# Altium PCB Beep-it.PcbDoc
Units mil, origin at the board's own origin, x right, y up, seen from the top; angles counter-clockwise.
Board outline 6000 x 4000 mil, 2 copper layers (Top Layer, Bottom Layer); 23 components, 21 nets, 78 pads, 0 vias.
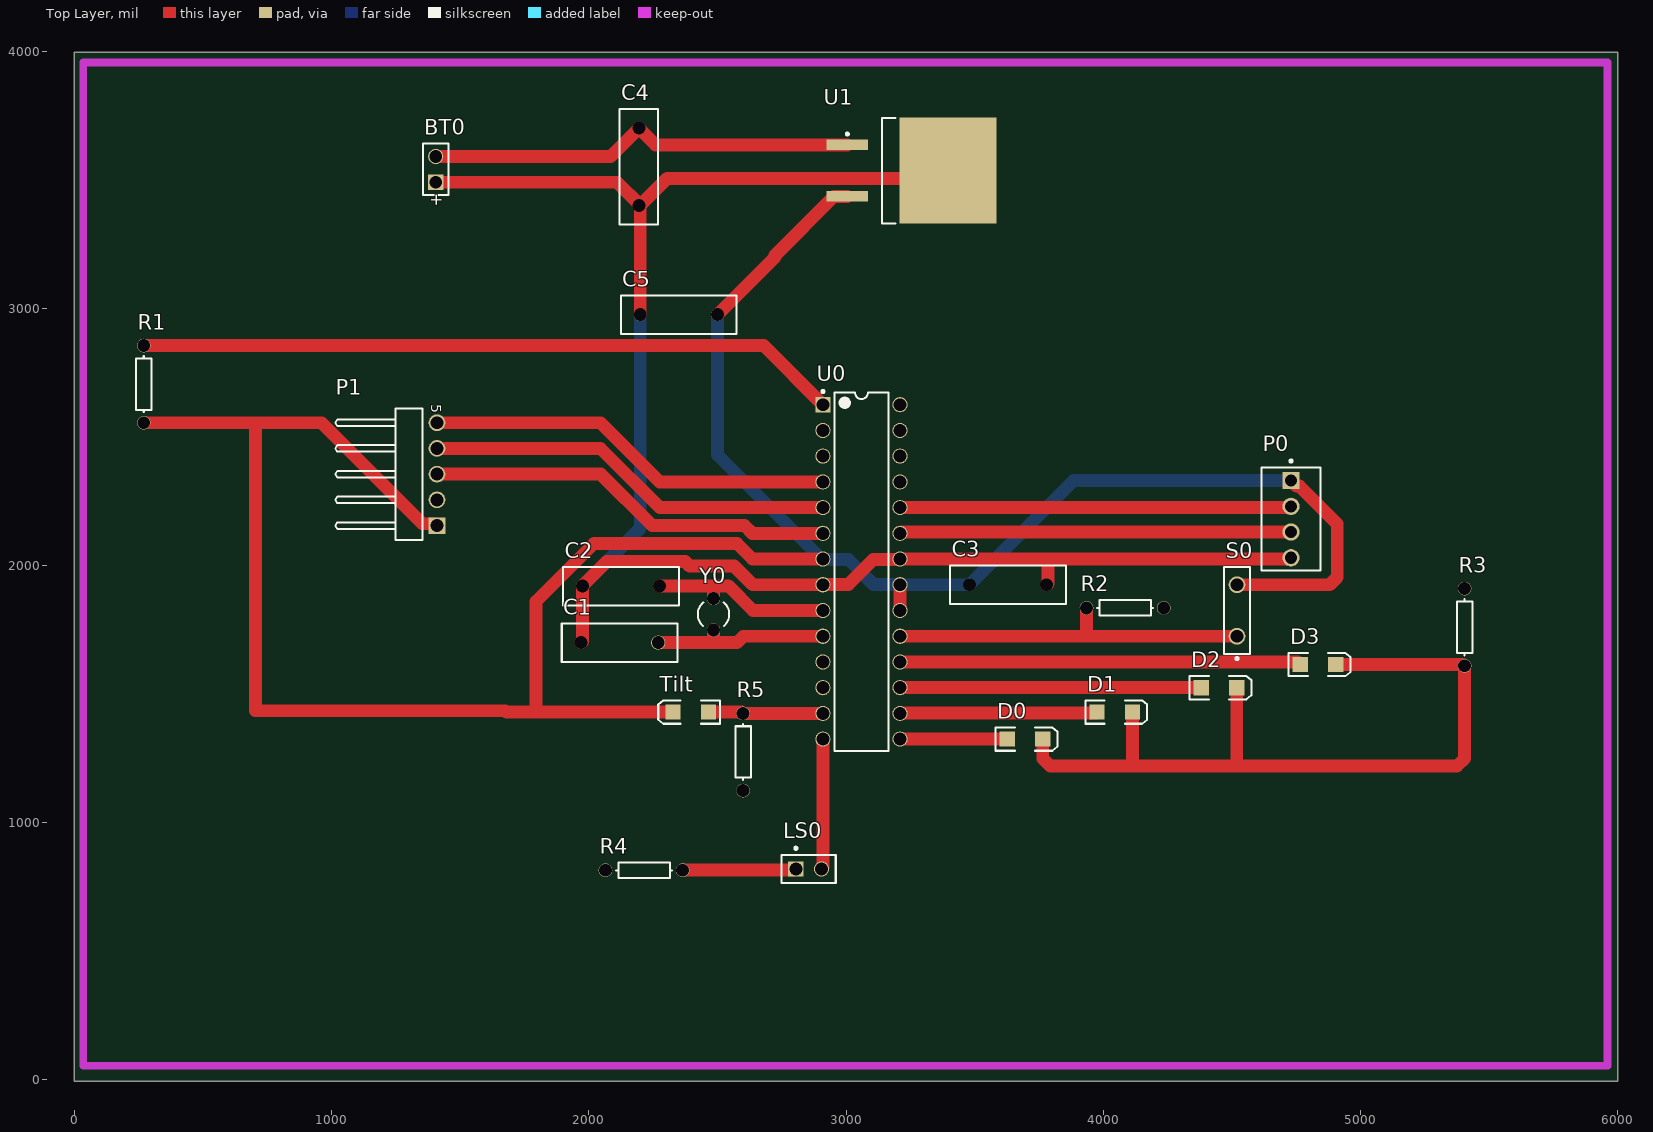
[diagram p0: Top Layer view]
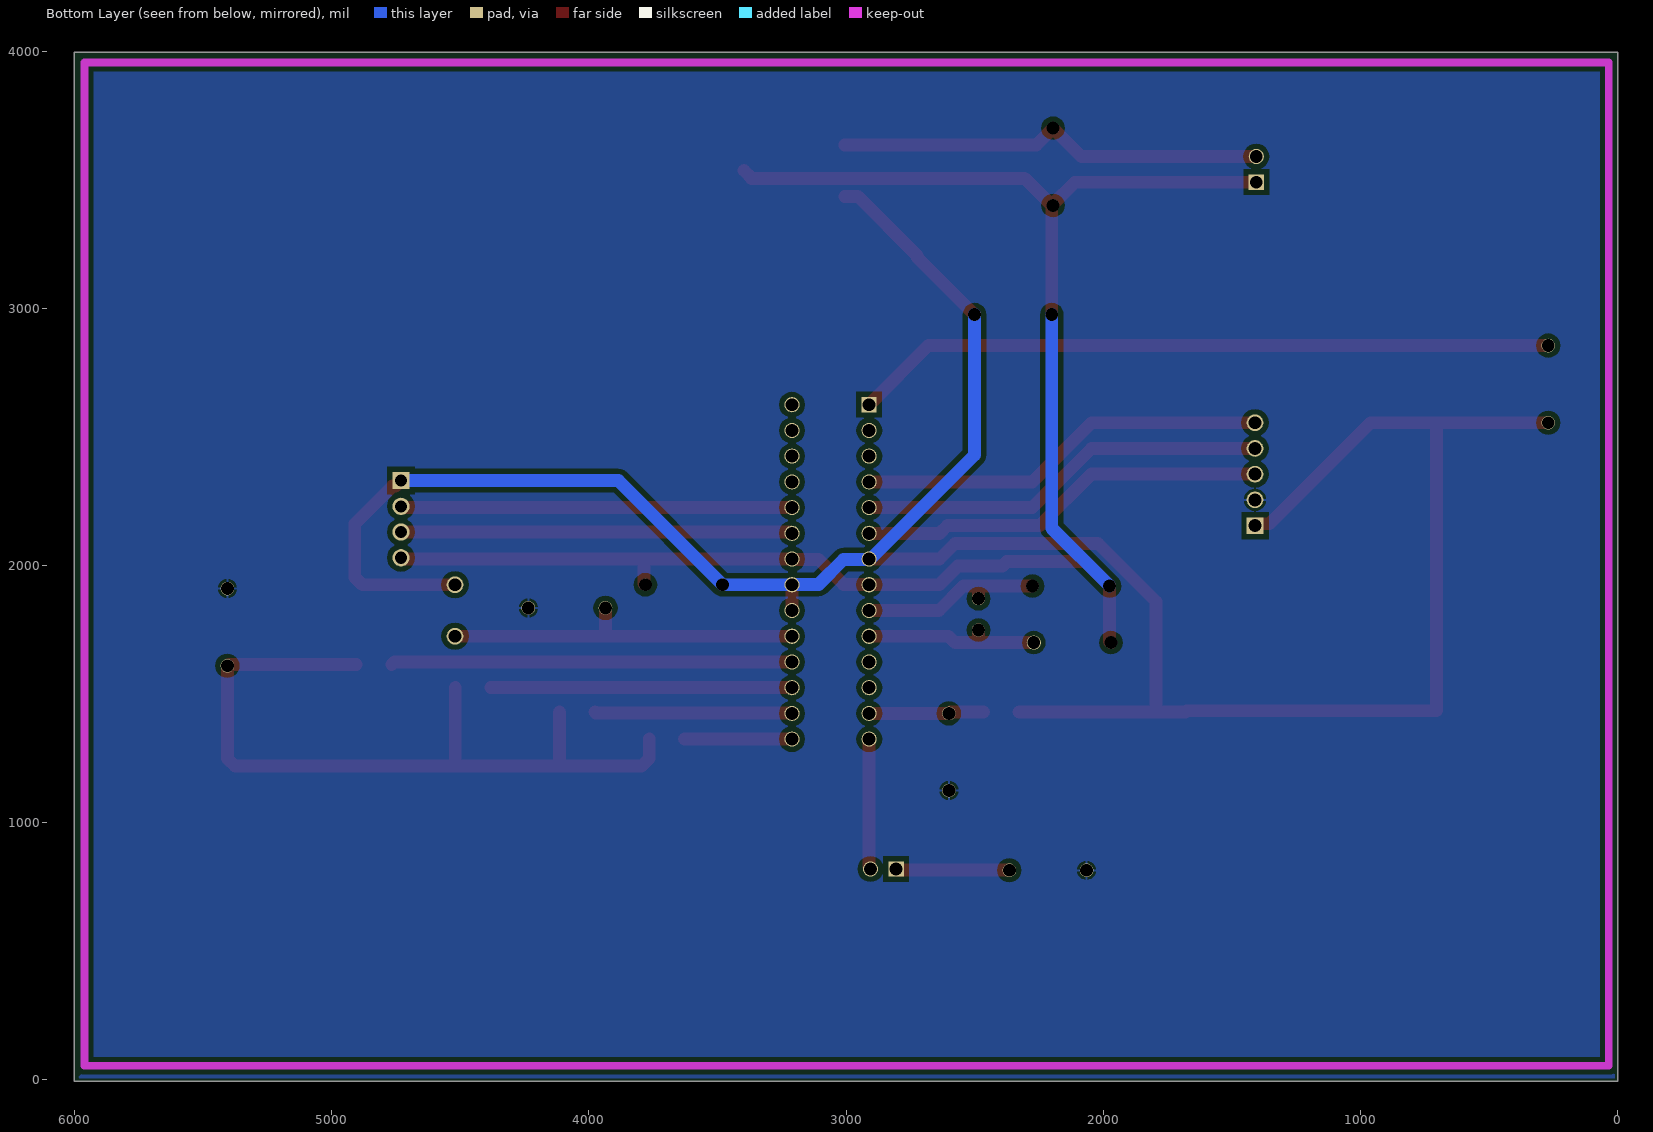
[diagram p1: Bottom Layer view, seen from below]

## Layer stack, top to bottom
Top Solder: solder mask 0.4, Solder Resist, Dk 3.5
Top Layer: signal copper 1.4
Dielectric 1: dielectric 12.6, FR-4, Dk 4.8
Bottom Layer: signal copper 1.4
Bottom Solder: solder mask 0.4, Solder Resist, Dk 3.5

## Board outline
0,-5 6000,-5 6000,3995 0,3995

## Design rules (kind name [scope] priority, off if disabled: settings)
BoardOutlineClearance [All] p1: gap=12 ignorepadtopadclearanceinfootprint=FALSE
Clearance [All] p1: gap=20 ignorepadtopadclearanceinfootprint=TRUE except(24: Arc-Via Track-Via SMDPad-Via THPad-Via Via-Via Via-Fill Via-Poly Via-Region Via-Text Via-Hole)
DiffPairsRouting [All] p1: maxlimit=10 minlimit=7 mostfreqgap=10 toplayer_minwidth=6 toplayer_maxwidth=15 toplayer_prefwidth=8 bottomlayer_minwidth=6 bottomlayer_maxwidth=15 bottomlayer_prefwidth=8 maxuncoupledlength=500
HoleSize [All] p1: absolutevalues=TRUE maxlimit=1000 minlimit=39.37 maxpercent=80.000 minpercent=20.000
HoleToHoleClearance [All] p1: gap=17 allowstackedmicrovias=TRUE
PolygonConnect [All] p1: connectstyle=Relief reliefconductorwidth=10 reliefentries=4 polygonreliefangle="90 Angle" airgapwidth=10
RoutingVias [All] p1: holewidth=30 width=35 viastyle="Through Hole" minholewidth=10 minwidth=11 maxholewidth=255 maxwidth=250
SilkToSilkClearance [All] p1: silktosilkclearance=0
SolderMaskExpansion SolderMaskExpansion_1 [All] p1: expansion=4 istentingtop=FALSE
Width [All] p1: maxlimit=10000 minlimit=30 preferedwidth=50 minimp=50.000000 maximp=50.000000 favimp=50.000000
26 further rules are at their usual default settings.

## Components (designator, comment, footprint, x,y, rotation, side; value= is the part's Value field where it differs from the comment)
BT0 "Battery" BAT-2 1405,3540 r90 top
C1 "Cap" RAD-0.3#1 2120,1700 r180 top value=100pF
C2 "Cap" RAD-0.3#2 2125,1920 r180 top value=100pF
C3 "Cap" RAD-0.3#2 3630,1925 r0 top value=100pF
C4 "Cap" RAD-0.3#2 2195,3550 r90 top value=100pF
C5 "Cap" RAD-0.3#2 2350,2975 r180 top value=100pF
D0 "LED2" 3.2X1.6X1.1 3696.1,1325 r0 top
D1 "LED2" 3.2X1.6X1.1 4045,1430 r0 top
D2 "LED2" 3.2X1.6X1.1 4450,1525 r0 top
D3 "LED2" 3.2X1.6X1.1 4835,1615 r0 top
LS0 "Speaker" PIN2 2805,820 r0 top
P0 "22-27-2041" MOLX-22-27-2041_V 4730,2180 r90 top
P1 "61300511021" 61300511021 1300.94,2355 r270 top
R1 "Res1" AXIAL-0.3 270,2705 r270 top value=1K
R2 "Res1" AXIAL-0.3 4085,1835 r180 top value=1K
R3 "Res1" AXIAL-0.3 5405,1760 r90 top value=1K
R4 "Res1" AXIAL-0.3 2215,815 r0 top value=1K
R5 "Res1" AXIAL-0.3 2600,1275 r90 top value=1K (schematic designator R?)
S0 "SW-SPST" SPST-2 4520,1825 r90 top
Tilt "LED2" 3.2X1.6X1.1 2396.1,1430 r180 top
U0 "ATmega328-PU" 28P3 3060,1975 r0 top
U1 "L7805CD2T-TR" TO-263_M 3255,3535 r0 top
Y0 "XTAL" R38 2485,1810 r180 top

## Footprints (in the part's own frame and the unit in brackets; to place one, negate y for a bottom-side part, rotate by r counter-clockwise, add the part's x,y. Pads: shape width x height; smd on the part's side, far side on the other; paste and mask are expansions set on the pad)
3.2X1.6X1.1 [mm] "SMT LED; 2 Flat Leads"
  rect 1.5x1.5 smd: 1(-1.75,0) 2(1.75,0)
  silkscreen extent -2.9,-1.15 3.2,1.15
28P3 [mm] "28-Pin Plastic Dual In-Line Package (PDIP)"
  rect 1.5x1.5 hole 1.27: 1(-3.81,16.51)
  round 1.5 hole 1.27: 2(-3.81,13.97) 3(-3.81,11.43) 4(-3.81,8.89) 5(-3.81,6.35) 6(-3.81,3.81) 7(-3.81,1.27) 8(-3.81,-1.27) 9(-3.81,-3.81) 10(-3.81,-6.35) 11(-3.81,-8.89) 12(-3.81,-11.43) 13(-3.81,-13.97) 14(-3.81,-16.51) 15(3.81,-16.51) 16(3.81,-13.97) 17(3.81,-11.43) 18(3.81,-8.89) 19(3.81,-6.35) 20(3.81,-3.81) 21(3.81,-1.27) 22(3.81,1.27) 23(3.81,3.81) 24(3.81,6.35) 25(3.81,8.89) 26(3.81,11.43) 27(3.81,13.97) 28(3.81,16.51)
  silkscreen extent -3.93,-17.7 2.65,17.93, body extent -3.6,-17.65 3.6,17.65, height 4.58
61300511021 [mm] "Pin Header, pitch 2.54 mm, THT, Angled, single row, 5p"
  rect 1.65x1.65 hole 1.27: 1(5.08,2.77)
  round 1.65 hole 1.27: 2(2.54,2.77) 3(0,2.77) 4(-2.54,2.77) 5(-5.08,2.77)
  silkscreen extent -6.5,-7.27 6.5,1.35, body extent -6.35,-7.27 6.35,3.09, height 2.58
AXIAL-0.3 [mil] "Axial Device, Thru-Hole; 2 Leads; 0.3 in Pin Spacing"
  round 53 hole 50: 1(-150,0) 2(150,0)
  silkscreen extent -109,-30 109,30
BAT-2 [mm] "Battery; 2 Leads"
  rect 1.5x1.5 hole 1.27: 1(-1.27,0)
  round 1.5 hole 1.27: 2(1.27,0)
  silkscreen extent -2.54,-1.27 2.54,1.27
MOLX-22-27-2041_V [mm] "CONN, 4-Leads, Body 10.16x5.8mm, Pitch 2.54mm"
  rect 1.7x1.7 hole 1.19: 1(3.81,0)
  round 1.7 hole 1.19: 2(1.27,0) 3(-1.27,0) 4(-3.81,0)
  silkscreen extent -5.08,-2.9 5.85,2.9, body extent -5.08,-2.9 5.08,2.9, height 11.7
PIN2 [mm] "Photosensitive Diode; 2 Leads"
  rect 1.5x1.5 hole 1.27: 1(0,0)
  round 1.5 hole 1.27: 2(2.54,0)
  silkscreen extent -1.4,-1.4 3.94,2.17
R38 [mm] "Crystal, Thru-Hole; 2 Leads; Body 3.1 x 8.2 mm (Dia.xH)"
  round 1.3 hole 1.27: 1(0,1.55) 2(0,-1.55)
  silkscreen extent -1.55,-1.19 1.55,1.17
RAD-0.3#1 [mil] "Radial Cap, Thru-Hole; 2 Leads; 0.3 in Pin Spacing"
  round 55 hole 50: 1(-150,0)
  round 47.24 hole 50: 2(150,0)
  silkscreen extent -225,-75 225,75
RAD-0.3#2 [mil] "Radial Cap, Thru-Hole; 2 Leads; 0.3 in Pin Spacing"
  round 47.24 hole 50: 1(-150,0) 2(150,0)
  silkscreen extent -225,-75 225,75
SPST-2 [mil] "Switch; 2 Leads"
  round 65 hole 50: 1(-100,0) 2(100,0)
  silkscreen extent -192,-50 169,50
TO-263_M [mm] "D2-PAK, 4-Leads, Body 9.2x10.2mm, Pitch 2.54mm, Lead Span 15.4mm, IPC Low Density"
  rect 4.1x1.05 smd: 1(-6.35,2.54) 3(-6.35,-2.54)
  rect 9.6x10.45 smd: 4(3.6,0)
  silkscreen extent -6.47,-5.2 -1.6,5.2, body extent -2.9,-5.2 6.45,5.2, height 4.6

## Part data
BT0: "Multicell Battery", LatestRevisionDate=17-Jul-2002, LatestRevisionNote="Re-released for DXP Platform.", PackageDescription="Battery; 2 Leads", PackageReference=BAT-2, Published=24-Mar-1999, Publisher="Altium Limited"
C1 C2 C3 C4 C5: "Capacitor", LatestRevisionDate=17-Jul-2002, LatestRevisionNote="Re-released for DXP Platform.", PackageDescription="Radial Cap, Thru-Hole; 2 Leads; 0.3 in Pin Spacing", PackageReference=RAD-0.3, Published=8-Jun-2000, Publisher="Altium Limited"
D0 D1 D2 D3 Tilt: "Typical RED, GREEN, YELLOW, AMBER GaAs LED", LatestRevisionDate=17-Jul-2002, LatestRevisionNote="Re-released for DXP Platform.", PackageDescription="SM LED; 2 Flat Leads", PackageReference=3.2X1.6X1.1, PackageVersion=Feb-2002, Published=8-Jun-2000, Publisher="Altium Limited"
LS0: "Loudspeaker", LatestRevisionDate=17-Jul-2002, LatestRevisionNote="Re-released for DXP Platform.", PackageReference=PIN2, Published=24-Mar-1999, Publisher="Altium Limited"
P0: library part CMP-2000-05243-1, "Male Header, Pitch 2.54 mm, 1 x 4 Position, Height 11.7 mm, Tail Length 3.56 mm, RoHS, Bulk", Current rating=4A, Manufacturer=Molex, Operating temperature=0degCto+75degC, Voltage rating=250V, Contact material=Tinplatedbrass, Datasheet URL=http://www.molex.com/pdm_docs/sd/022272041_sd.pdf, Datasheet Version="Rev. F, 06/2009", Housing material=Nylon(UL94V-0), Manufacturer URL=http://www.molex.com/
P1: library part CMP-1502-01067-1, "THT Angled Pin Header WR-PHD, Pitch 2.54 mm, Single Row, 5 pins", Contact Resistance=20mOhm, Manufacturer="Wurth Elektronik", Operating temperature=-40to105degC, Rated Current=3A, Withstanding Voltage=500VAC, Working Voltage=250VAC, Datasheet URL=https://katalog.we-online.de/em/datasheet/6130xx11021.pdf, Gender=Male, Manufacturer URL=http://www.we-online.de, Mounting Technology=THT, Orientation=Angled, Package Reference=61300511021, Packaging=Bag, Part Number=61300511021, Pin Number=5, Pitch=2.54mm, Publisher=WurthElektronik, Row Number=Single
R1 R2 R3 R4 R5: "Resistor", LatestRevisionDate=17-Jul-2002, LatestRevisionNote="Re-released for DXP Platform.", PackageDescription="Axial Device, Thru-Hole; 2 Leads; 0.3 in Pin Spacing", PackageReference=AXIAL-0.3, Published=8-Jun-2000, Publisher="Altium Limited"
S0: "Single-Pole, Single-Throw Switch", LatestRevisionDate=17-Jul-2002, LatestRevisionNote="Re-released for DXP Platform.", PackageDescription="Switch; 2 Leads", PackageReference=SPST-2, Published=24-Mar-1999, Publisher="Altium Limited"
U0: library part CMP-0095-00015-2, "8-bit AVR Microcontroller, 32KB Flash, 1KB EEPROM, 2KB SRAM, 28-pin PDIP, Industrial Grade (-40°C to 85°C)", ComponentLink1Description="Manufacturer URL", ComponentLink1URL=http://www.atmel.com/, ComponentLink2Description="ATmega48A/48PA/88A/88PA/168A/168PA/328/328P Datasheet", ComponentLink2URL=http://www.atmel.com/dyn/resources/prod_documents/8271.pdf, ComponentLink3Description="ATmega48A/48PA/88A/88PA/168A/168PA/328/328P Summary", ComponentLink3URL=http://www.atmel.com/dyn/resources/prod_documents/8271S.pdf, DatasheetVersion="revD, May-2011", PackageDescription="28-lead (0.300\"/7.62mm Wide) Plastic Dual Inline Package (PDIP)", PackageReference=28P3, PackageVersion="revB, Sep-2001", RevisionNote="DatasheetVersion updated. URLs added."
U1: library part CMP-0244-00213-1, "Positive Voltage Regulator, 3-Pin D2PAK, Tape and Reel", ComponentLink1Description="Manufacturer URL", ComponentLink1URL=http://www.st.com, ComponentLink2Description=Datasheet, ComponentLink2URL=http://www.st.com/internet/com/TECHNICAL_RESOURCES/TECHNICAL_LITERATURE/DATASHEET/CD00000444.pdf, DatasheetVersion=16/11/2011, PackageDescription="3-Pin Transistor Outline Package 2.54 mm Pitch, 15.4 mm Lead Span (D2PAK)", PackageReference=TO-263, PackageVersion=2011
Y0: "Crystal Oscillator", LatestRevisionDate=17-Jul-2002, LatestRevisionNote="Re-released for DXP Platform.", PackageDescription="Crystal, Thru-Hole; 2 Leads; Body 3.1 x 8.2 mm (Dia.xH)", PackageReference=R38, Published=8-Jun-2000, Publisher="Altium Limited"

## Nets (pads, with @x,y where several pads share a name; then routed paths per layer and width w, separated by ;. In a path a pad name is that pad's centre, name@x,y a point inside that pad or via, vN(x,y) a via of type N, cw(c..) or ccw(c..) an arc to the next point about the centre after c; other vN are vias at no path point)
GND: P1.2 R2.1 R3.2 R4.1 R5.1
NetBT0_1: BT0.1 C1.2 C2.2 C3.2 C4.1 C5.2 P0.4 U0.8 U0.22 U1.4 | length 6857.4
  Top Layer w50: BT0.1 2110,3490 C4.1@2200,3400 ; C1.2 1975,1705 C2.2 2070,2015 2375,2015 2392.56,1997.44 2565.33,1997.44 2637.77,1925 U0.8 2911.73,1926.73 3009.28,1926.73 3105.82,2023.27 3208.27,2023.27 U0.22 3785,2025 ; C5.2 C4.1@2200,3400 ; U1.4 3366.73,3505 2305,3505 C4.1@2200,3400 ; C3.2 3785,1930 3785,2025 ; P0.4 4725.42,2030 4720.42,2025 3785,2025
  Bottom Layer w50: C2.2 2200,2145 C5.2
NetBT0_2: BT0.2 C4.2 U1.1 | length 1672.5
  Top Layer w50: BT0.2 2085,3590 C4.2 2260,3635 U1.1
NetC1_1: C1.1 U0.10 Y0.1 | length 701.4
  Top Layer w50: C1.1 2490,1700 ; Y0.1 2485.23,1748.75 2485.23,1704.77 2490,1700 ; U0.10 2601.27,1725 2576.27,1700 2490,1700
NetC2_1: C2.1 U0.9 Y0.2 | length 727.5
  Top Layer w50: C2.1 2475,1920 ; Y0.2 2484.77,1871.25 2484.77,1910.23 2475,1920 ; U0.9 2638.77,1825 2543.77,1920 2475,1920
NetC3_1: C3.1 C5.1 P0.1 P1.1 R1.2 S0.2 Tilt.2 U0.7 U0.20 U0.21 U1.3 | length 10533.6
  Top Layer w50: R1.2 720,2555 ; P1.1 1402.52,2162.48 1353.46,2162.48 960.94,2555 720,2555 ; Tilt.2 1785,1430 ; C5.1 2724.65,3199.65 2724.65,3206.02 2953.62,3435 U1.3 ; U0.7 2636.76,2025 2576.76,2085 2020,2085 1795,1860 1795,1440 1785,1430 ; U0.20 U0.21 ; S0.2 4880.71,1925 4910,1954.29 4910,2160.97 4762.5,2308.46 4751.54,2308.46 P0.1 ; 720,2555 705,2540 705,1435 1675,1435 1680,1430 1785,1430
  Bottom Layer w50: C5.1 2500,2429.6 2902.87,2026.73 2908.27,2026.73 U0.7 2911.73,2023.27 3009.28,2023.27 3105.82,1926.73 3208.27,1926.73 U0.21 C3.1 3885,2330 P0.1
NetD0_1: D0.1 U0.15 | length 417.2
  Top Layer w50: U0.15 D0.1
NetD0_2: D0.2 D1.2 D2.2 D3.2 R3.1 | length 3123
  Top Layer w50: D0.2 3765,1249.29 3794.29,1220 4110,1220 ; D1.2 4113.9,1223.9 4110,1220 ; D2.2 4518.9,1226.1 4525,1220 ; D3.2 5398.62,1615 5403.62,1610 R3.1 5405,1249.29 5375.71,1220 4525,1220 ; 4110,1220 4525,1220
NetD1_1: D1.1 U0.16 | length 768.2
  Top Layer w50: U0.16 3211.73,1426.73 3972.84,1426.73 D1.1
NetD2_1: D2.1 U0.17 | length 1171.1
  Top Layer w50: U0.17 D2.1
NetD3_1: D3.1 U0.18 | length 1560.2
  Top Layer w50: U0.18 4756.1,1625 D3.1
NetLS0_1: LS0.1 R4.2 | length 442.1
  Top Layer w50: R4.2 2365.98,815.98 2800.98,815.98 LS0.1
NetLS0_2: LS0.2 U0.14 | length 507.1
  Top Layer w50: LS0.2 2905,822.45 2910,827.45 U0.14
NetP0_2: P0.2 U0.24 | length 1522.1
  Top Layer w50: U0.24 4720.42,2225 4725.42,2230 P0.2
NetP0_3: P0.3 U0.23 | length 1522.1
  Top Layer w50: U0.23 3212.45,2125 3217.45,2130 P0.3
NetP1_3: P1.3 U0.6 | length 1595.3
  Top Layer w50: P1.3 2046.8,2355 2246.8,2155 2605.76,2155 2635.76,2125 U0.6
NetP1_4: P1.4 U0.5 | length 1595.3
  Top Layer w50: P1.4 2045.8,2455 2275.8,2225 U0.5
NetP1_5: P1.5 U0.4 | length 1595.3
  Top Layer w50: P1.5 2045.8,2555 2275.8,2325 U0.4
NetR1_1: R1.1 U0.1 | length 2735.3
  Top Layer w50: R1.1 2680,2855 U0.1
NetR2_2: R2.2 S0.1 U0.19 | length 1420
  Top Layer w50: U0.19 3935,1725 ; R2.2 3935,1725 ; S0.1 3935,1725
NetR5_2: R5.2 Tilt.1 U0.13 | length 447.1
  Top Layer w50: Tilt.1 2593.62,1430 2598.62,1425 R5.2 U0.13
pads on no net: U0.2 U0.3 U0.11 U0.12 U0.25 U0.26 U0.27 U0.28

## Polygon pours and split planes (outlines as drawn)
GND on Bottom Layer "GND" (solid, pour order 0): -5,3995 5,3985 5970,3985 5970,25 5995,0 5,0

## Keep-outs
Keep-Out Layer:
  lines w30: 35,55 35,3955 5960,3955 5960,55 35,55

## Text inside footprints (layer, text, board x,y; h text height)
BT0: Top Overlay "+" at 1427.72,3395.51 h45.28 r90
P1: Top Overlay "5" at 1387.56,2627.44 h40 r270